# Altium PCB BSPD_V1.1.PcbDoc
Units mm, origin at the board's own origin, x right, y up, seen from the top; angles counter-clockwise.
Board outline 90 x 53 mm, 4 copper layers (Top Copper, Signal Layer 1, Signal Layer 2, Bottom Copper), stack 1.57 mm thick; 84 components, 54 nets, 263 pads, 174 vias.
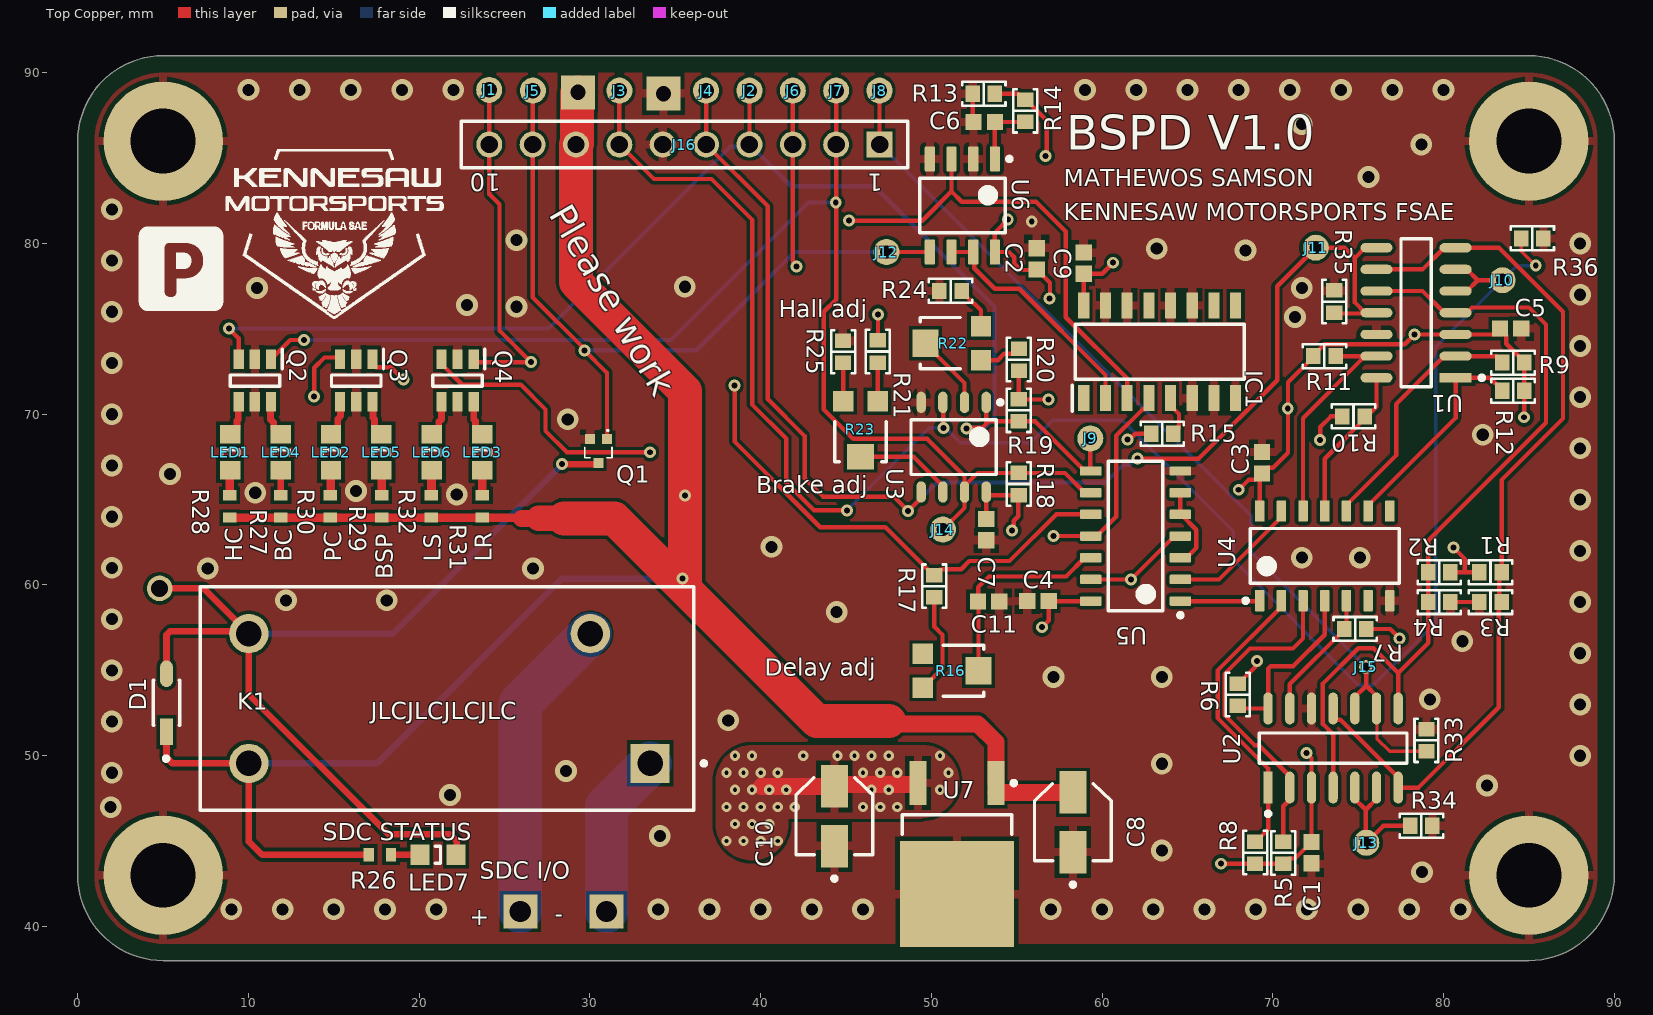
[diagram p0: Top Copper view]
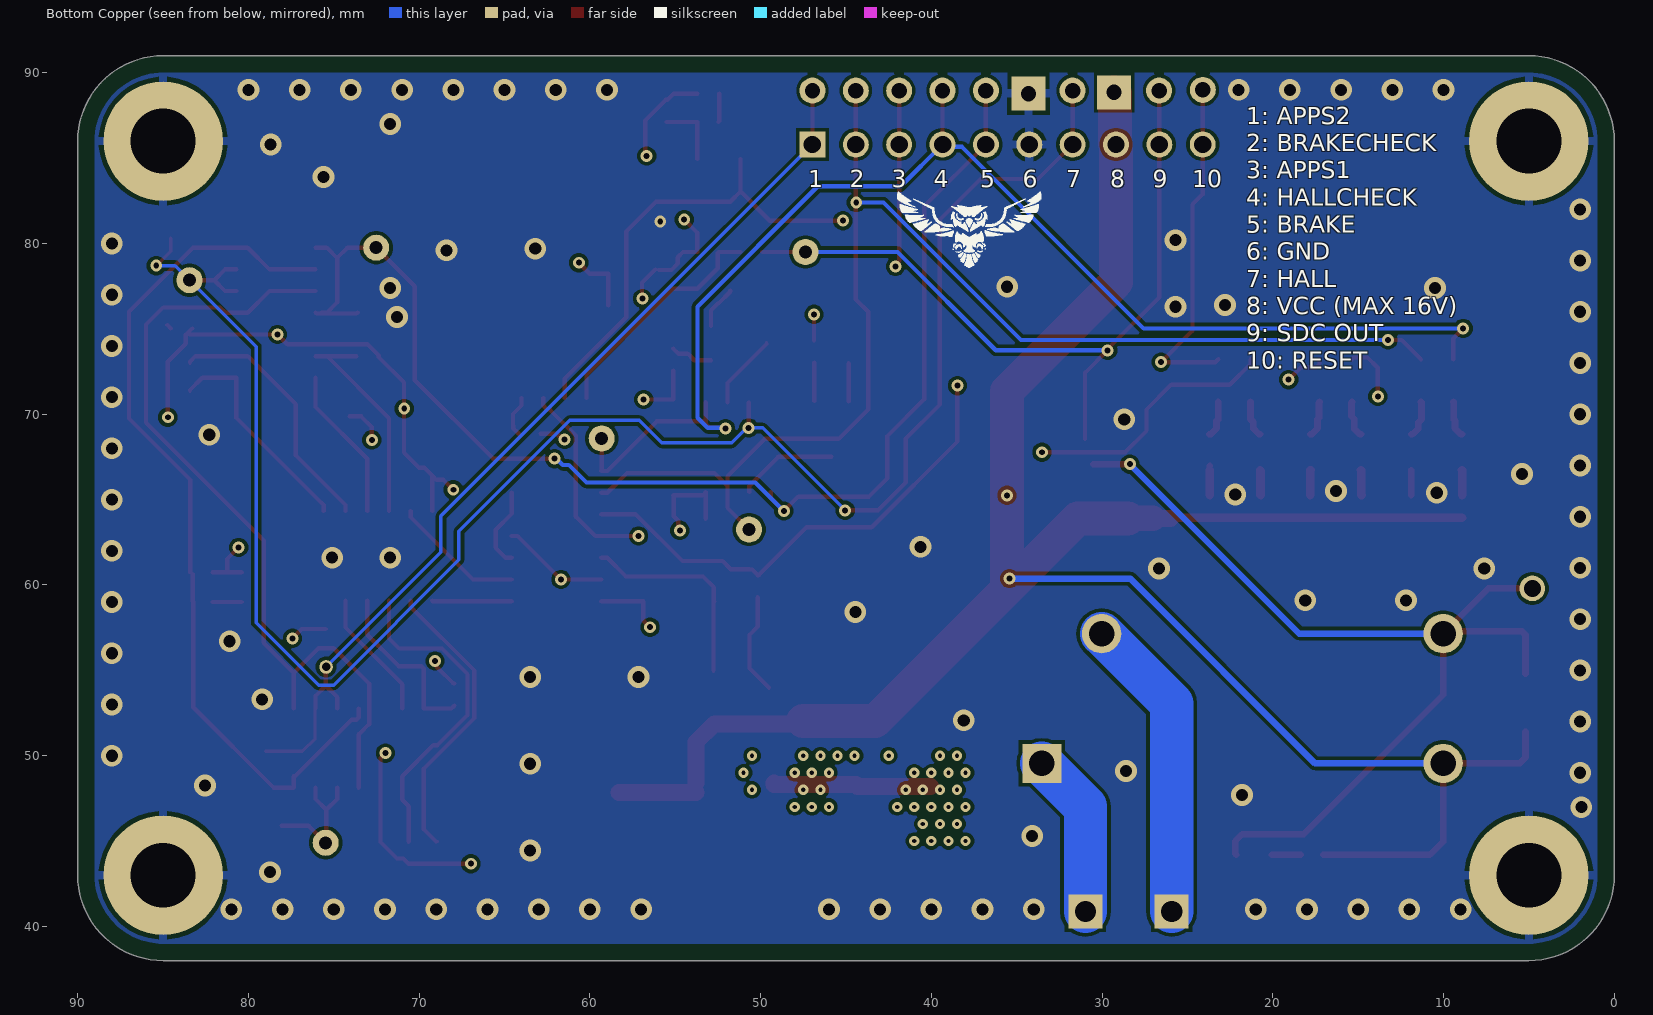
[diagram p1: Bottom Copper view, seen from below]
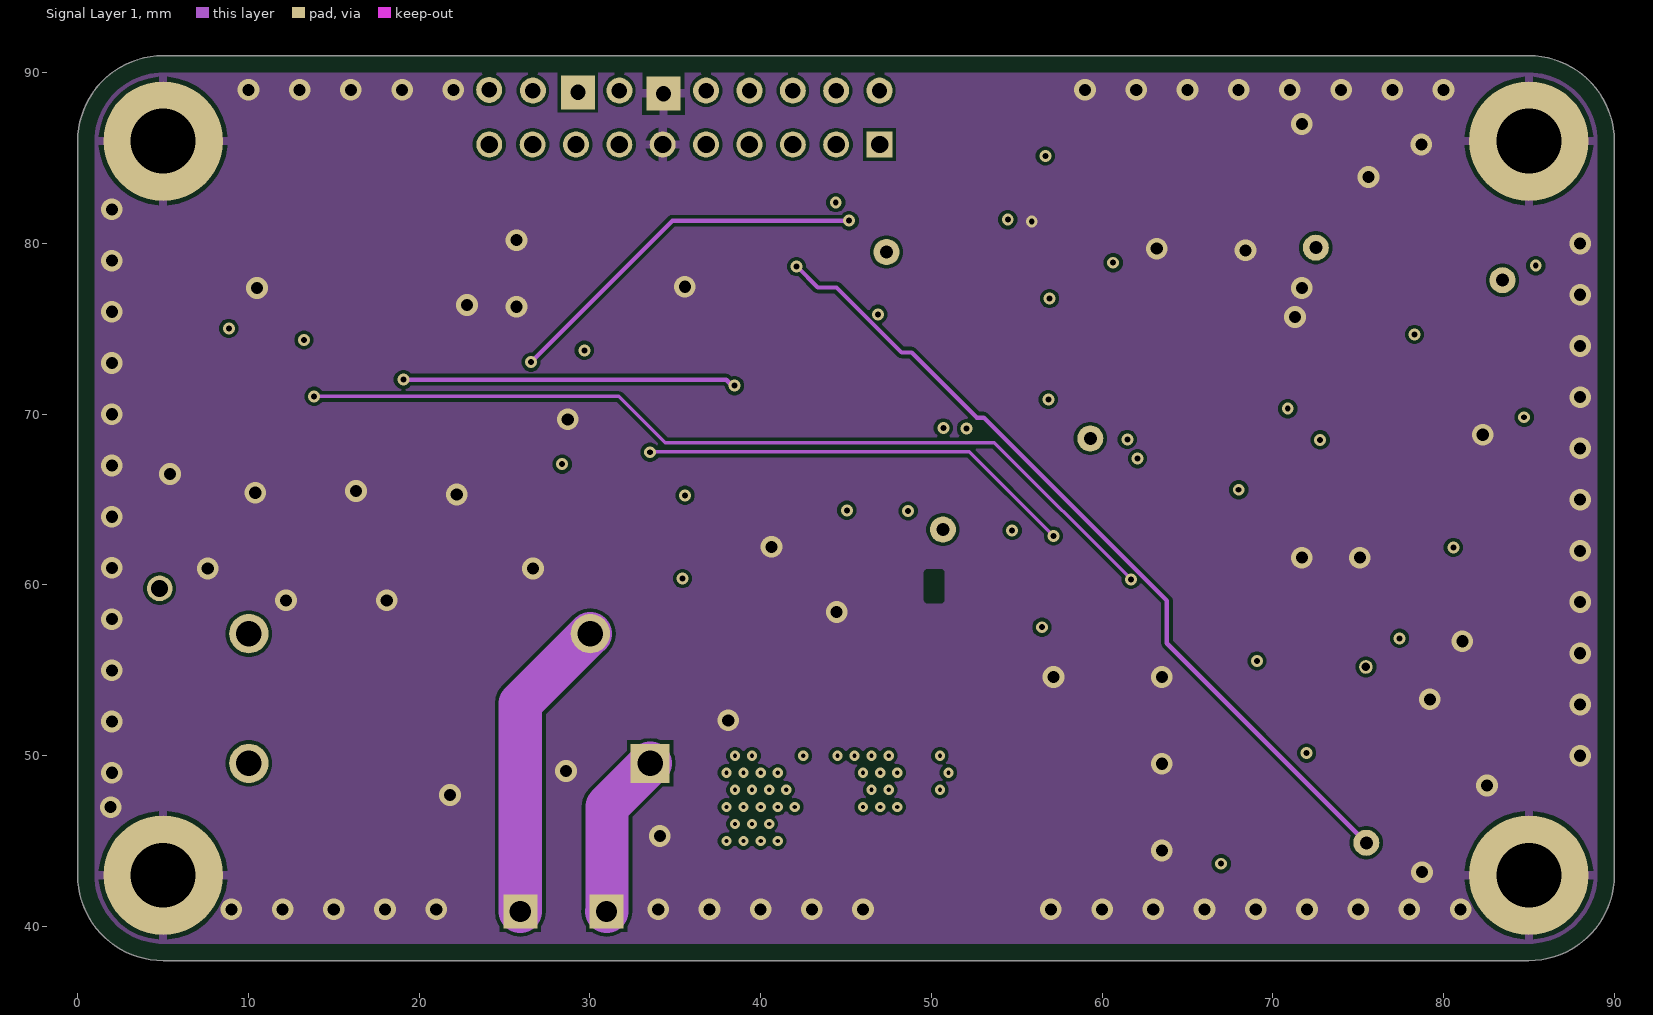
[diagram p2: Signal Layer 1]
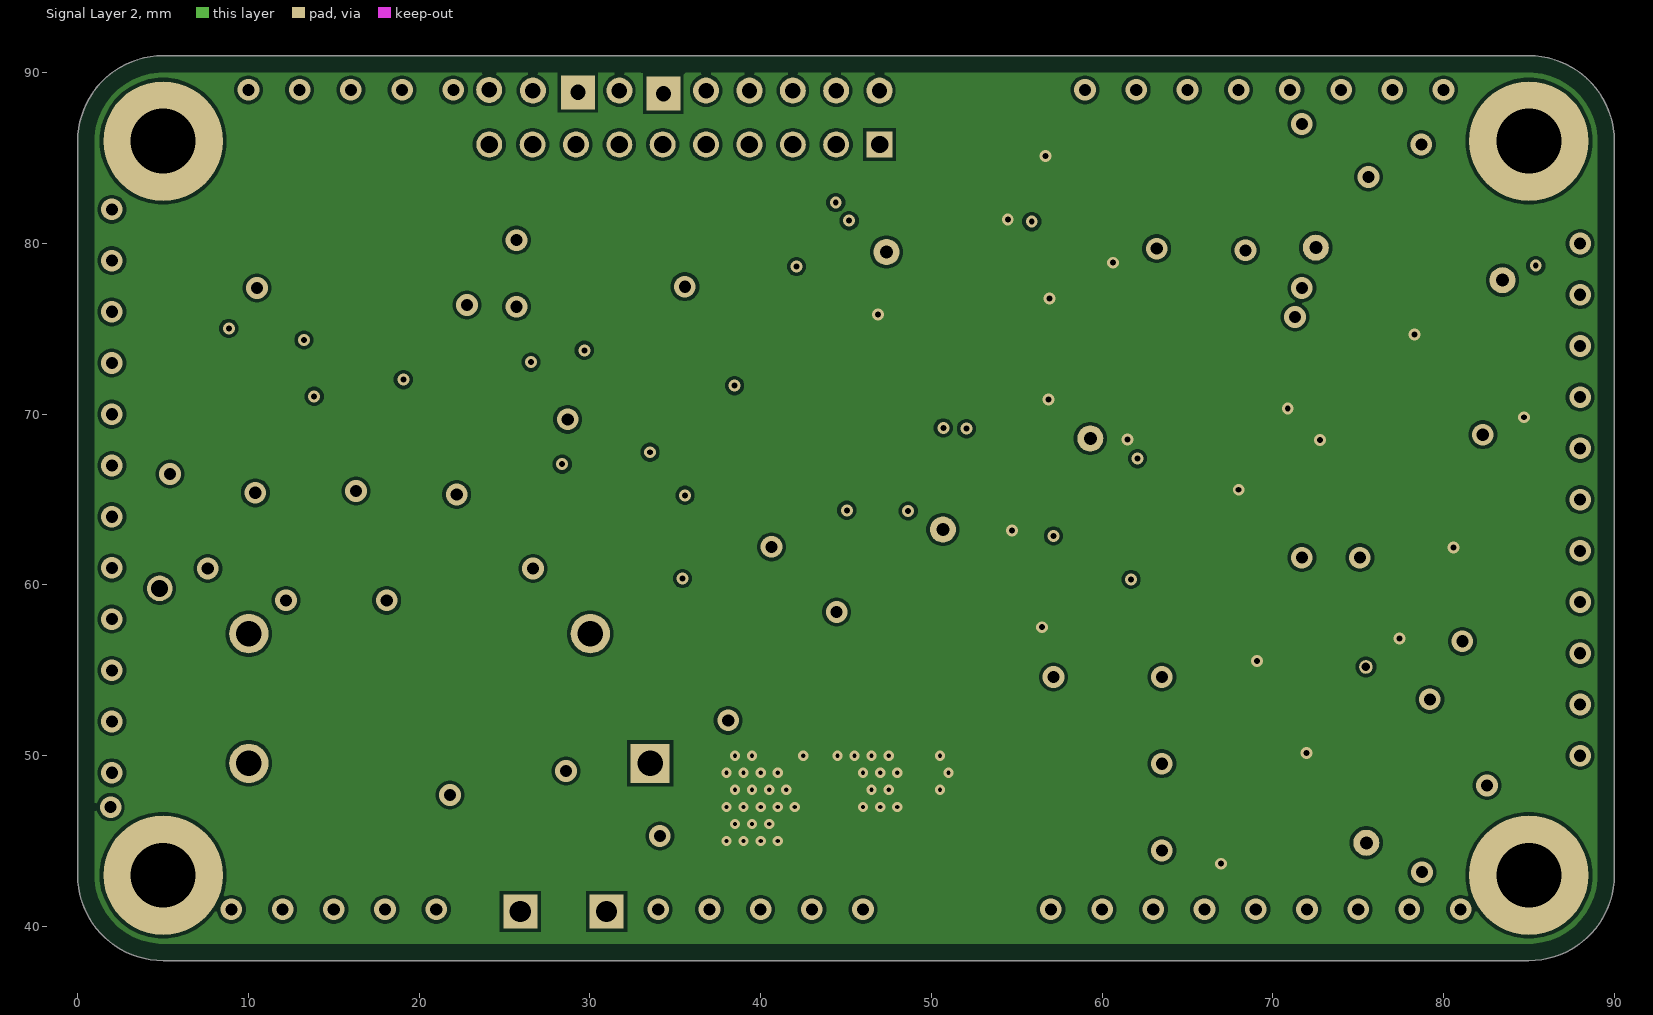
[diagram p3: Signal Layer 2]
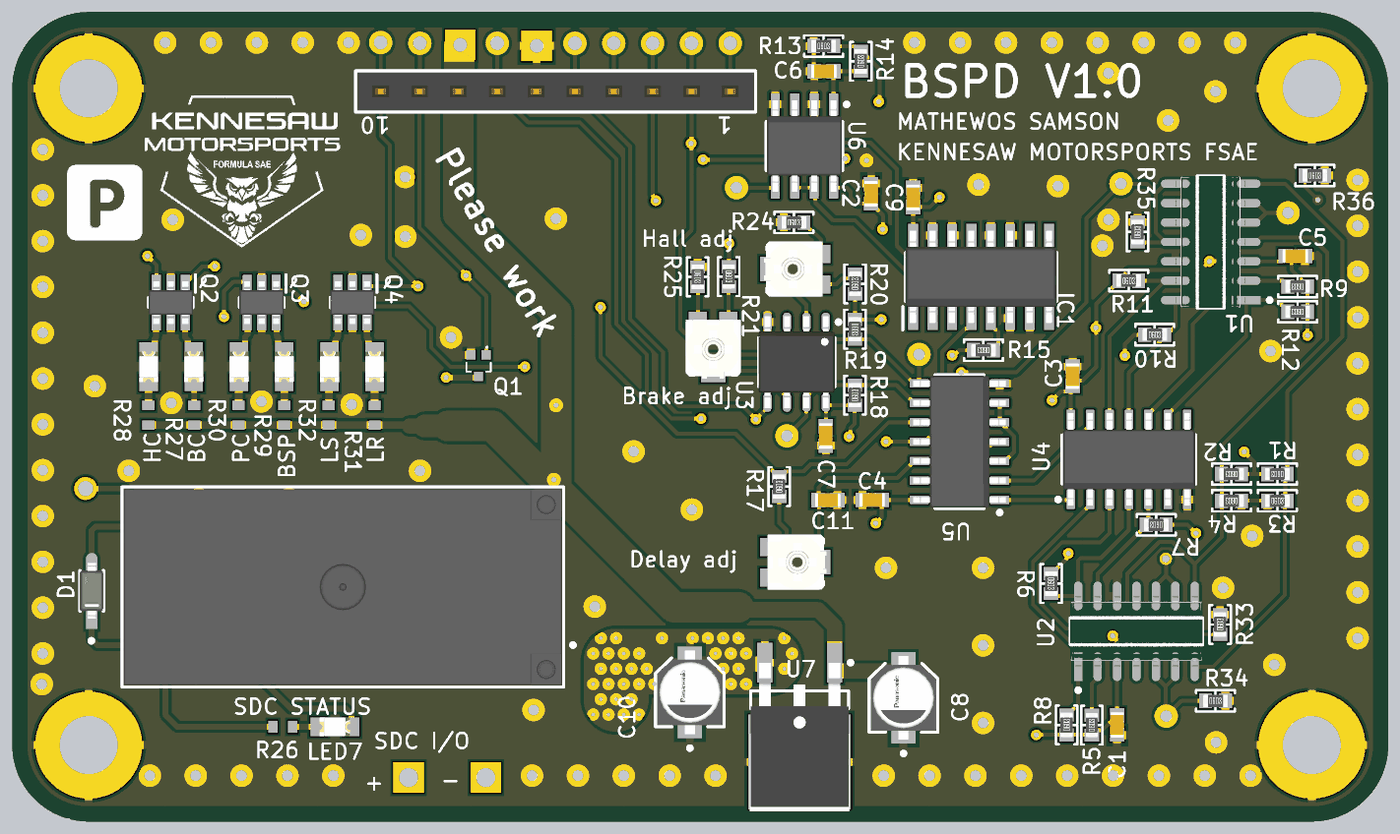
[diagram p4: 3D render of the assembled board from above, using the file's embedded part models]

## Layer stack, top to bottom
Top Mask: solder mask 0.015, Solder Resist, Dk 3.8
Top Copper: signal copper 0.035
Dielectric 1: prepreg 0.1, 2313, Dk 4.05
Signal Layer 1: signal copper 0.0175
Core: core 1.265, FR-4, Dk 4.5
Signal Layer 2: signal copper 0.0175
Dielectric 2: prepreg 0.1, 2313, Dk 4.05
Bottom Copper: signal copper 0.035
Bottom Mask: solder mask 0.015, Solder Resist, Dk 3.8

## Board outline
5,38 cw(c5,43) 0,43 0,86.005 cw(c5,86) 5,91 85,91 cw(c85,86) 90,86 90,43 cw(c85,43) 85,38

## Design rules (kind name [scope] priority, off if disabled: settings)
BoardOutlineClearance [All] p1: gap=0.2 ignorepadtopadclearanceinfootprint=FALSE except(0.4: Arc-SplitBarrior Arc-SplitContinuation Track-SplitBarrior Track-SplitContinuation SMDPad-SplitBarrior SMDPad-SplitContinuation THPad-SplitBarrior THPad-SplitContinuation Via-SplitBarrior Via-SplitContinuation Fill-SplitBarrior Fill-SplitContinuation Poly-SplitBarrior Poly-SplitContinuation Region-SplitBarrior Region-SplitContinuation Text-SplitBarrior Text-SplitContinuation)
Clearance "Clearance Bottom Layer" [OnLayer('Bottom Layer')] p1: gap=0.203 ignorepadtopadclearanceinfootprint=TRUE except(0.254: Arc-Text Track-Text SMDPad-Text THPad-Text Via-Text Fill-Text Poly-Text Region-Text Text-Text)
Clearance "Clearance Top Layer" [OnLayer('Top Layer')] p2: gap=0.203 ignorepadtopadclearanceinfootprint=TRUE except(0.254: Arc-Text Track-Text SMDPad-Text THPad-Text Via-Text Fill-Text Poly-Text Region-Text Text-Text)
Clearance [All] p3: gap=0.2 ignorepadtopadclearanceinfootprint=FALSE except(0.089: Arc-Arc Arc-Track Arc-SMDPad Track-Track Track-SMDPad SMDPad-SMDPad; 0.127: Arc-Via Track-Via SMDPad-Via THPad-Via Via-Via; 0.254: Arc-Text Track-Text SMDPad-Text THPad-Text Via-Text Fill-Text Poly-Text Region-Text Text-Text)
HoleSize [All] p1: absolutevalues=TRUE maxlimit=6.3 minlimit=0.2 maxpercent=80.000 minpercent=20.000
MinimumAnnularRing [All] p1: minimumring=0.076
MinimumSolderMaskSliver [All] p1: minsoldermaskwidth=0.1
PolygonConnect PolygonConnect_1 [All] p1: thpad.connectstyle=Relief thpad.reliefconductorwidth=0.508 thpad.reliefentries=4 thpad.polygonreliefangle="90 Angle" thpad.airgapwidth=0.254 smdpad.connectstyle=Relief smdpad.reliefconductorwidth=0.508 smdpad.reliefentries=4 smdpad.polygonreliefangle="90 Angle" smdpad.airgapwidth=0.254 via.connectstyle=Direct via.reliefconductorwidth=0.508 via.reliefentries=4 via.polygonreliefangle="90 Angle" via.airgapwidth=0.254
RoutingCorners [All] p1: cornerstyle=Round minsetback=2.54 maxsetback=2.54
RoutingVias [All] p1: holewidth=0.5 width=1 viastyle="Through Hole" minholewidth=0.2 minwidth=0.45 maxholewidth=1 maxwidth=2
SilkToSilkClearance [All] p1: silktosilkclearance=0.1
SilkToSolderMaskClearance [IsPad] p1: minsilkscreentomaskgap=0.1 clearancetoexposedcopper=TRUE
SolderMaskExpansion [All] p1: expansion=0.102 istentingtop=FALSE
Width [All] p1: maxlimit=2.54 minlimit=0.089 preferedwidth=0.381 toplayer_minwidth=0.089 minimp=50.000000 maximp=50.000000 favimp=50.000000
25 further rules are at their usual default settings.

## Classes and differential pairs
component class Sheet3: D1 J1 J2 J3 J4 J5 J6 J7 J8 J9 J10 J11 J12 J13 J14 J15 K1 LED1 LED2 LED3 LED4 LED5 LED6 LED7 Q1 Q2 Q3 Q4 R26 R27 R28 R29 R30 R31 R32
component class U_Sheet2: J16 R33 R34 R35 R36
component class U_BSPD_V1.1: C1 C2 C3 C4 C5 C6 C7 C8 C9 C10 C11 IC1 R1 R2 R3 R4 R5 R6 R7 R8 R9 R10 R11 R12 R13 R14 R15 R16 R17 R18 R19 R20 R21 R22 R23 R24 R25 U1 U2 U3 U4 U5 U6 U7

## Components (designator, comment, footprint, x,y, rotation, side; value= is the part's Value field where it differs from the comment)
C1 "Capacitor 100 nF +/-10% 50 V 0603" CAPC1608X90X40NL10T20 72.264,44.323 r270 top value=100nF
C2 "Capacitor 100 nF +/-10% 50 V 0603" CAPC1608X90X40NL10T20 56.175,79.1 r90 top value=100nF
C3 "Capacitor 100 nF +/-10% 50 V 0603" CAPC1608X90X40NL10T20 69.358,67.157 r90 top value=100nF
C4 "Capacitor 100 nF +/-10% 50 V 0603" CAPC1608X90X40NL10T20 56.246,59.055 r180 top value=100nF
C5 "Capacitor 100 nF +/-10% 50 V 0603" CAPC1608X90X40NL10T20 83.925,75.025 r0 top value=100nF
C6 "Capacitor 100 nF +/-10% 50 V 0603" CAPC1608X90X40NL10T20 53.096,87.122 r0 top value=10uF
C7 "Capacitor 100 nF +/-10% 50 V 0603" CAPC1608X90X40NL10T20 53.213,63.246 r270 top value=100nF
C8 "EEEFK1E100R" FP-FKB-MFG 58.293,46.101 r90 top
C9 "Capacitor 100 nF +/-10% 50 V 0603" CAPC1608X90X40NL10T20 58.928,78.857 r90 top value=100nF
C10 "EEEFK1E100R" FP-FKB-MFG 44.323,46.454 r90 top
C11 "Capacitor 100 nF +/-10% 50 V 0603" CAPC1608X90X40NL10T20 53.35,59.04 r0 top value=10uF
D1 "1N5819HW-7-F" FP-SOD123-IPC_A 5.2,53.1 r90 top
IC1 "CD4043BD" SOIC127P600X175-16N 63.373,73.66 r90 top
J1 "22AWG JUMPER" "22 AWG Hole"#1 24.1,89 r0 top
J2 "22AWG JUMPER" "22 AWG Hole"#2 39.232,88.955 r270 top
J3 "22AWG JUMPER" "22 AWG Hole"#3 30.825,88.955 r270 top
J4 "22AWG JUMPER" "22 AWG Hole"#4 36.311,88.955 r270 top
J5 "22AWG JUMPER" "22 AWG Hole"#1 26.659,88.955 r270 top
J6 "22AWG JUMPER" "22 AWG Hole"#5 41.899,88.955 r270 top
J7 "22AWG JUMPER" "22 AWG Hole"#6 44.35,88.955 r0 top
J8 "22AWG JUMPER" "22 AWG Hole"#7 46.85,88.955 r0 top
J9 "22AWG JUMPER" "22 AWG Hole"#8 59.309,68.58 r90 top
J10 "22AWG JUMPER" "22 AWG Hole"#8 83.45,77.85 r180 top
J11 "22AWG JUMPER" "22 AWG Hole"#8 72.517,79.756 r90 top
J12 "22AWG JUMPER" "22 AWG Hole"#8 47.371,79.502 r180 top
J13 "22AWG JUMPER" "22 AWG Hole"#8 75.475,44.9 r180 top
J14 "22AWG JUMPER" "22 AWG Hole"#8 50.673,63.246 r180 top
J15 "22AWG JUMPER" "22 AWG Hole"#9 75.45,55.2 r180 top
J16 "61301011821" 61301011821 35.535,85.8 r180 top locked
K1 "JW1AFSN-DC12V-TV-F" FP-JW1AFSN-DC12V-TV-F-MFG 21.625,53.35 r180 top
LED1 "150080SS75000" 0805_A 8.925,67.775 r270 top
LED2 "150080SS75000" 0805_A 14.835,67.775 r270 top
LED3 "150080SS75000" 0805_A 23.7,67.775 r270 top
LED4 "150080SS75000" 0805_A 11.88,67.775 r270 top
LED5 "150080SS75000" 0805_A 17.79,67.775 r270 top
LED6 "150080SS75000" 0805_A 20.745,67.775 r270 top
LED7 "150080SS75000" 0805_A 21.1,44.2 r180 top
Q1 "SSM3K36FS,LF" 1SS423 30.5,67.85 r180 top
Q2 "QS6K1FRATR" SOT95P280X100-6N 10.375,71.975 r270 top locked
Q3 "QS6K1FRATR" SOT95P280X100-6N 16.312,71.975 r270 top locked
Q4 "QS6K1FRATR" SOT95P280X100-6N 22.25,71.975 r270 top locked
R1 "10 kOhms" "RES 0603_1608" 82.75,60.75 r180 top
R2 "1.1 KOhms" "RES 0603_1608" 79.75,60.75 r180 top
R3 "1.1 KOhms" "RES 0603_1608" 82.75,59 r0 top
R4 "10 kOhms" "RES 0603_1608" 79.75,59 r180 top
R5 "5K" "RES 0603_1608" 70.613,44.308 r90 top
R6 "5K" "RES 0603_1608" 67.946,53.579 r270 top
R7 "5K" "RES 0603_1608" 74.825,57.425 r180 top
R8 "5K" "RES 0603_1608" 68.962,44.323 r90 top
R9 "5K" "RES 0603_1608" 84.074,73.025 r180 top
R10 "5K" "RES 0603_1608" 74.725,69.875 r0 top
R11 "5K" "RES 0603_1608" 73.025,73.406 r0 top
R12 "5K" "RES 0603_1608" 84.074,71.374 r180 top
R13 "500k" "RES 0603_1608" 53.071,88.773 r0 top
R14 "100K" "RES 0603_1608" 55.499,87.772 r90 top
R15 "5K" "RES 0603_1608" 63.524,68.858 r180 top
R16 "10 kOhms" "POT BOURNS TRIMPOT TC33" 51.308,54.976 r270 top
R17 "50K" "RES 0603_1608" 50.165,59.929 r90 top
R18 "5K" "RES 0603_1608" 55.118,65.913 r90 top
R19 "5K" "RES 0603_1608" 55.118,70.231 r270 top
R20 "5K" "RES 0603_1608" 55.125,73.2 r90 top
R21 "5K" "RES 0603_1608" 46.863,73.675 r270 top
R22 "10 kOhms" "POT BOURNS TRIMPOT TC33" 51.107,74.168 r90 top
R23 "10 kOhms" "POT BOURNS TRIMPOT TC33" 45.847,68.961 r180 top
R24 "5K" "RES 0603_1608" 51.125,77.225 r0 top
R25 "5K" "RES 0603_1608" 44.831,73.66 r270 top
R26 "RC0603FR-072K2L" RESC1608X55X25LL10T15 17.7,44.2 r0 top
R27 "RC0603FR-072K2L" RESC1608X55X25LL10T15 11.9,64.6 r270 top
R28 "RC0603FR-072K2L" RESC1608X55X25LL10T15 8.9,64.6 r270 top
R29 "RC0603FR-072K2L" RESC1608X55X25LL10T15 17.8,64.6 r270 top
R30 "RC0603FR-072K2L" RESC1608X55X25LL10T15 14.8,64.6 r270 top
R31 "RC0603FR-072K2L" RESC1608X55X25LL10T15 23.7,64.6 r270 top
R32 "RC0603FR-072K2L" RESC1608X55X25LL10T15 20.7,64.6 r270 top
R33 "50K" "RES 0603_1608" 79,50.9 r90 top
R34 "50K" "RES 0603_1608" 78.7,45.9 r0 top
R35 "50K" "RES 0603_1608" 73.6,76.6 r90 top
R36 "50K" "RES 0603_1608" 85.2,80.3 r0 top
U1 "LM139DR" FP-D0014A-IPC_C 78.389,75.946 r180 top
U2 "LM139DR" FP-D0014A-IPC_C 73.534,50.449 r90 top
U3 "LM393DT" STM-SO-8_D_L 51.308,68.072 r270 top
U4 "CD4002BM96" D0014A_L 73.041,61.706 r90 top
U5 "CD4011BM96" D0014A_L 61.961,62.865 r180 top
U6 "CD40107BM96" D0008A_N 51.816,82.228 r270 top
U7 "LF50ABDT-TRY" DPAK228P972X238-3N 51.5,44.25 r270 top

## Footprints (in the part's own frame and the unit in brackets; to place one, negate y for a bottom-side part, rotate by r counter-clockwise, add the part's x,y. Pads: shape width x height; smd on the part's side, far side on the other; paste and mask are expansions set on the pad)
1SS423 [mm]
  rect 0.6x0.6 smd: 1(-0.5,-0.7) 2(0.5,-0.7) 3(0,0.7)
  silkscreen extent -0.8,-1.25 0.8,0.4
"22 AWG Hole"#1 [mil] "Solder 22awg or whatever wire fits into this"
  round 60 hole 35.43 mask+0: 1(0,0)
"22 AWG Hole"#2 [mil] "Solder 22awg or whatever wire fits into this"
  round 60 hole 35.43 mask+0: 1(0,4.45)
"22 AWG Hole"#3 [mil] "Solder 22awg or whatever wire fits into this"
  round 60 hole 35.43 mask+0: 1(0,35.43)
"22 AWG Hole"#4 [mil] "Solder 22awg or whatever wire fits into this"
  round 60 hole 35.43 mask+0: 1(0,19.45)
"22 AWG Hole"#5 [mil] "Solder 22awg or whatever wire fits into this"
  round 60 hole 35.43 mask+0: 1(0,-0.55)
"22 AWG Hole"#6 [mil] "Solder 22awg or whatever wire fits into this"
  round 60 hole 35.43 mask+0: 1(2.95,0)
"22 AWG Hole"#7 [mil] "Solder 22awg or whatever wire fits into this"
  round 60 hole 35.43 mask+0: 1(4.53,0)
"22 AWG Hole"#8 [mil] "Solder 22awg or whatever wire fits into this"
  round 60 hole 30 mask+0: 1(0,0)
"22 AWG Hole"#9 [mil] "Solder 22awg or whatever wire fits into this"
  round 31.5 hole 19.68 mask+0: 1(0,0)
0805_A [mm] "Chip LED, 2-Leads, Body 2.0x1.3mm, IPC Medium Density"
  rect 1.1x1.2 smd: 1(-1.05,0) 2(1.05,0)
  silkscreen extent -0.15,-0.5 0.15,0.5, body extent -1,-0.62 1,0.63, height 0.68
61301011821 [mm] "Socket Header, Pitch 2.54 mm, THT, Vertical, single row, 10p"
  rect 1.52x1.52 hole 1.02: 1(-11.43,0)
  round 1.52 hole 1.02: 2(-8.89,0) 3(-6.35,0) 4(-3.81,0) 5(-1.27,0) 6(1.27,0) 7(3.81,0) 8(6.35,0) 9(8.89,0) 10(11.43,0)
  silkscreen extent -13.08,-1.35 13.08,1.35, body extent -12.95,-1.25 12.95,1.25, height 8.55
CAPC1608X90X40NL10T20 [mm] "Chip Capacitor, 2-Leads, Body 1.70x0.90mm, IPC Medium Density"
  rect 0.95x0.95 smd: 1(-0.625,0) 2(0.625,0)
  body extent -0.85,-0.45 0.85,0.45, height 0.9
D0008A_N [mm] "SOIC, 8-Leads, Body 5x4mm, Pitch 1.27mm, IPC Medium Density"
  rrect17% 1.45x0.6 smd: 1(-2.725,1.905) 2(-2.725,0.635) 3(-2.725,-0.635) 4(-2.725,-1.905) 5(2.725,-1.905) 6(2.725,-0.635) 7(2.725,0.635) 8(2.725,1.905)
  silkscreen extent -2.85,-2.5 1.6,2.88, body extent -3,-2.45 3,2.45, height 1.63
D0014A_L [mm] "SOIC, 14-Leads, Body 8.75x4mm, Pitch 1.27mm, IPC High Density"
  rrect18% 1.25x0.55 smd: 1(-2.625,3.81) 2(-2.625,2.54) 3(-2.625,1.27) 4(-2.625,0) 5(-2.625,-1.27) 6(-2.625,-2.54) 7(-2.625,-3.81) 8(2.625,-3.81) 9(2.625,-2.54) 10(2.625,-1.27) 11(2.625,0) 12(2.625,1.27) 13(2.625,2.54) 14(2.625,3.81)
  silkscreen extent -2.75,-4.38 1.6,4.76, body extent -3.02,-4.32 3.02,4.32, height 1.59
DPAK228P972X238-3N [mm] "D-PAK, 3-Pads, Body 6.40x6.56mm (max), IPC Medium Density"
  rect 2.6x1 smd: 1(-4.15,2.28) 3(-4.15,-2.28)
  rect 6.2x6.7 smd: 4(2.35,0)
  silkscreen extent -4.27,-3.2 -1.15,3.46, body extent -4.12,-3.25 5.6,3.25, height 3.28
FP-D0014A-IPC_C [mm]
  rect 1.874x0.542 smd paste+0 mask+0: 1(-2.316,3.81)
  rrect100% 1.874x0.542 smd paste+0 mask+0: 2(-2.316,2.54) 3(-2.316,1.27) 4(-2.316,0) 5(-2.316,-1.27) 6(-2.316,-2.54) 7(-2.316,-3.81) 8(2.316,-3.81) 9(2.316,-2.54) 10(2.316,-1.27) 11(2.316,0) 12(2.316,1.27) 13(2.316,2.54) 14(2.316,3.81)
  silkscreen extent -3.98,-4.33 0.88,4.33, body extent -3.35,-4.43 3.35,4.43, height 0.25
FP-FKB-MFG [mm]
  rect 2.5x1.6 smd paste+0 mask+0: 1(-1.75,0) 2(1.75,0)
  silkscreen extent -3.77,-2.25 2.25,2.25, body extent -3.25,-2.5 3.25,2.5, height 0.25
FP-JW1AFSN-DC12V-TV-F-MFG [mm]
  rect 2.3x2.3 hole 1.5 paste-1000 mask+0: 1(-11.9,3.8)
  round 2.3 hole 1.5 paste-1000 mask+0: 2(11.6,3.8) 3(-8.4,-3.8) 4(11.6,-3.8)
  silkscreen extent -15.18,-6.55 14.45,6.55, body extent -14.55,-6.65 14.55,6.65, height 0.25
FP-SOD123-IPC_A [mm]
  rect 1.557x0.742 smd paste+0 mask+0: 1(-1.7,0)
  rrect100% 1.557x0.742 smd paste+0 mask+0: 2(1.7,0)
  silkscreen extent -3.39,-0.77 1.33,0.77, body extent -2.98,-1.28 2.98,1.28, height 0.25
"POT BOURNS TRIMPOT TC33" [mm] "Bourns Trimpot TC33X-1 - Open Frame 3mm x 3.8mm x 1.2mm"
  rect 1.2x1.2 smd: 1(-1,-1.8) 3(1,-1.8)
  rect 1.6x1.5 smd: 2(0,1.45)
  silkscreen extent -1.5,-0.6 1.5,1.75, body extent -1.8,-1.91 1.8,1.95, height 1.15
"RES 0603_1608" [mm] "Chip Resistor, 2-Leads, Body 1.60x0.80mm, IPC Medium Density"
  rect 0.85x0.95 smd: 1(-0.65,0) 2(0.65,0)
  silkscreen extent -1.27,-0.7 1.27,0.7, body extent -0.8,-0.4 0.8,0.4, height 0.45
RESC1608X55X25LL10T15 [mm] "Chip Resistor, 2-Leads, Body 1.60x0.80mm, IPC High Density"
  rect 0.6x0.8 smd: 1(-0.65,0) 2(0.65,0)
  body extent -0.85,-0.45 0.85,0.45, height 0.55
SOIC127P600X175-16N [mm]
  rect 1.525x0.65 smd: 1(-2.712,4.445) 2(-2.712,3.175) 3(-2.712,1.905) 4(-2.712,0.635) 5(-2.712,-0.635) 6(-2.712,-1.905) 7(-2.712,-3.175) 8(-2.712,-4.445) 9(2.712,-4.445) 10(2.712,-3.175) 11(2.712,-1.905) 12(2.712,-0.635) 13(2.712,0.635) 14(2.712,1.905) 15(2.712,3.175) 16(2.712,4.445)
  silkscreen extent -3.47,-4.95 1.6,5.12, body extent -3.01,-4.94 3.01,4.96, height 1.75
SOT95P280X100-6N [mm]
  rect 1.15x0.6 smd: 1(-1.25,0.95) 2(-1.25,0) 3(-1.25,-0.95) 4(1.25,-0.95) 5(1.25,0) 6(1.25,0.95)
  silkscreen extent -1.83,-1.45 0.33,1.6, body extent -1.4,-1.45 1.4,1.45, height 1
STM-SO-8_D_L [mm] "SOIC, 8-Leads, Body 5x4mm, Pitch 1.27mm, IPC High Density"
  oval 1.25x0.55 smd: 1(-2.625,1.905) 2(-2.625,0.635) 3(-2.625,-0.635) 4(-2.625,-1.905) 5(2.625,-1.905) 6(2.625,-0.635) 7(2.625,0.635) 8(2.625,1.905)
  silkscreen extent -2.75,-2.5 1.6,2.86, body extent -3,-2.5 3,2.5, height 1.75

## Part data
C1 C2 C3 C4 C5 C6 C7 C9 C11: library part CMP-001-00017-6, "Chip Capacitor, 100 nF, +/- 10%, 50 V, 0603 (1608 Metric)", Capacitor Type=Ceramic, Case/Package=0603, Max Operating Temperature=125°C, Min Operating Temperature=-55°C, Tolerance=10%, Voltage Rating=50V, Mounting Technology=SM, Pins=2, RoHS Compliant=True
C8 C10: library part CMP-05427-000055-1, "CAP ALUM 10UF 20% 25V SMD", Capacitance=10uF, Case/Package=Radial, Dielectric Material=Aluminium, ESR (Equivalent Series Resistance)=1.35R, Leakage Current=3uA, Max Operating Temperature=105°C, Min Operating Temperature=-55°C, Package Quantity=1, Ripple Current=90mA, Tolerance=20%, Voltage=25V, Construction=Cylindrical, Contact Plating=Tin, Diameter=4mm, Height=5.8mm, Height - Seated (Max)=0.24inch, Impedance=1.35R, Lead Free="Lead Free", Length=5.8mm, Life (Hours)=2000Hour, Mount="Surface Mount", Number of Pins=2, Packaging="Tape and Reel", Polarity=Polar, Radiation Hardening=No, REACH SVHC="No SVHC", Ripple Current (AC)=90mA, RoHS Compliant=Yes, Series=FK, Termination=SMD/SMT, Voltage Rating=25V, Voltage Rating (DC)=25V, Width=5.5mm
D1: library part CMP-0303-00003-3, "DIODE SCHOTTKY 40V 1A SOD123", Average Rectified Current=1A, Capacitance=110pF, Case/Package=SOD-123-2, Forward Voltage=450mV, Max Forward Surge Current (Ifsm)=25A, Max Operating Temperature=125°C, Max Power Dissipation=450mW, Max Repetitive Reverse Voltage (Vrrm)=40V, Min Operating Temperature=-65°C, Package Quantity=3000, Peak Reverse Current=50uA, Contact Plating=Tin, Current Rating=1A, Element Configuration=Single, Forward Current=1A, Height=1.25mm, Lead Free="Lead Free", Length=2.85mm, Max Reverse Voltage (DC)=40V, Number of Pins=2, Output Current=1A, Packaging="Tape and Reel", Peak Non-Repetitive Surge Current=25A, Polarity=Standard, Radiation Hardening=No, REACH SVHC="No SVHC", Termination=SMD/SMT, Voltage Rating (DC)=40V, Weight=0.000353oz, Width=1.7mm
IC1: "Integrated Circuit", Manufacturer_Name="Texas Instruments", Mouser Part Number=595-CD4043BD, Arrow Part Number=CD4043BD, Arrow Price/Stock=https://www.arrow.com/en/products/cd4043bd/texas-instruments, Datasheet Link=http://www.ti.com/lit/gpn/CD4043B, Height=1.75mm, Manufacturer_Part_Number=CD4043BD, Mouser Price/Stock=https://www.mouser.co.uk/ProductDetail/Texas-Instruments/CD4043BD?qs=LSR%252BNeaw%2FwBT%2FmtVlwfGdg%3D%3D
J16: library part CMP-1502-01332-1, "THT Vertical Socket Header WR-PHD, Pitch 2.54 mm, Single Row, 10 pins", Contact Resistance=20mOhm, Manufacturer="Wurth Elektronik", Operating Temperature=-40to125degC, Rated Current=3A, Withstanding Voltage=500VAC, Working Voltage=250VAC, Datasheet URL=https://katalog.we-online.de/em/datasheet/6130xx11821.pdf, Gender=Female, Manufacturer URL=http://www.we-online.de, Mounting Technology=THT, Orientation=Vertical, Package Reference=61301011821, Packaging=Tray, Part Number=61301011821, Pin Number=10, Pitch=2.54mm, Publisher=WurthElektronik, Row Number=Single
K1: library part CMP-05606-000032-1, "RELAY GEN PURPOSE SPST 10A 12V", Coil Current=44mA, Coil Power=530mW, Coil Resistance=270R, Coil Voltage (DC)=12V, Contact Current Rating=10A, Max Operating Temperature=60°C, Max Voltage Rating (AC)=250V, Max Voltage Rating (DC)=30V, Min Operating Temperature=-40°C, Package Quantity=100, Coil Type=Non-Latching, Contact Material=Tin, Current Rating=10A, Depth=28.6mm, Height=20mm, Length=12.8mm, Life (Hours)=5Hour, Max Current Rating=10A, Mount="Through Hole", Number of Pins=4, Operate Time=15ms, Packaging=Bulk, Relay Type="General Purpose", Release Time=5ms, Series=JW, Termination="PC Pin", Throw Configuration=SPST, Weight=13g
LED1 LED2 LED3 LED4 LED5 LED6 LED7: library part CMP-1426-00010-1, "SMD mono-color Chip LED, WL-SMCW, Super Red", Color="Super Red", Manufacturer="Wuerth Elektronik", ComponentLink1Description="Manufacturer URL", ComponentLink1URL=http://www.we-online.com, ComponentLink2Description=Datasheet, ComponentLink2URL=http://katalog.we-online.com/led/datasheet/150080SS75000.pdf, PackageReference=0805_A, PartNumber=150080SS75000
Q1: "MOSFET (N-Channel)", Manufacturer_Name=Toshiba, Mouser Part Number=757-SSM3K36FSLF, Arrow Part Number=SSM3K36FS,LF, Arrow Price/Stock=https://www.arrow.com/en/products/ssm3k36fslf/toshiba, Datasheet Link=http://toshiba.semicon-storage.com/info/docget.jsp?did=11220&prodName=SSM3K36FS, Height=0mm, Manufacturer_Part_Number=SSM3K36FS,LF, Mouser Price/Stock=https://www.mouser.co.uk/ProductDetail/Toshiba/SSM3K36FSLF?qs=rsevcuukUAyNuioVUhNFrQ%3D%3D
Q2 Q3 Q4: "MOSFET (N-Channel)", Manufacturer_Name="ROHM Semiconductor", Mouser Part Number=755-QS6K1FRATR, Datasheet Link=https://www.rohm.com/products/mosfets/automotive/dual/qs6k1fra-product, Height=1mm, Manufacturer_Part_Number=QS6K1FRATR, Mouser Price/Stock=https://www.mouser.co.uk/ProductDetail/ROHM-Semiconductor/QS6K1FRATR?qs=4v%252BiZTmLVHGPs3XXnzhw7A%3D%3D
R1 R4: library part CPF0603B10KE, "RES SMD 10K OHM 0.1% 1/16W 0603", Device Package="0603 (1608 Metric)", Manufacturer="TE Connectivity Passive Product", Operating Temperature="-55°C ~ 155°C", Power (Watts)="0.063W, 1/16W", Supplier Device Package=0603, Supplier Part Number 1=A119886CT-ND, Temperature Coefficient=±25ppm/°C, Tolerance=±0.1%, ComponentLink1Description=Datasheet, ComponentLink1URL=https://www.te.com/commerce/DocumentDelivery/DDEController?Action=srchrtrv&DocNm=1773200&DocType=DS&DocLang=English, ComponentLink2Description="DigiKey Link", ComponentLink2URL=http://digikey.com/product-detail/en/te-connectivity-passive-product/CPF0603B10KE/A119886CT-ND/4966484, Composition="Thin Film", Height - Seated (Max)="0.022\" (0.55mm)", LastUpdated="9/2/2020 1:10:25 AM", Lifecycle Status=Active, Minimum Order=1, Number of Terminations=2, Package / Case="0603 (1608 Metric)", Packaging=TapeAndReel, Part Number=CPF0603B10KE, Part Status=Active, PartId=4872, Price=0.09, Resistance="10 kOhms", Series="CPF, Neohm", Size / Dimension="0.061\" L x 0.031\" W (1.55mm x 0.80mm)", Supplier 1=DigiKey
R2 R3: library part RK73H1JTTD4420F, "RES 442 OHM 1% 1/8W 0603", Device Package="0603 (1608 Metric)", Manufacturer="KOA Speer Electronics, Inc.", Operating Temperature="-55°C ~ 155°C", Power (Watts)="0.125W, 1/8W", Ratings=AEC-Q200, Resistance="442 Ohms", Supplier Device Package=0603, Supplier Part Number 1=2019-RK73H1JTTD4420FCT-ND, Temperature Coefficient=±100ppm/°C, Tolerance=±1%, ComponentLink1Description=Datasheet, ComponentLink1URL=http://www.koaspeer.com/catimages/Products/RK73H/RK73H.pdf, ComponentLink2Description="DigiKey Link", ComponentLink2URL=http://digikey.com/product-detail/en/koa-speer-electronics-inc/RK73H1JTTD4420F/2019-RK73H1JTTD4420FCT-ND/9847257, Composition="Thick Film", Features="Automotive AEC-Q200, Moisture Resistant", Height - Seated (Max)="0.022\" (0.55mm)", LastUpdated="9/2/2020 1:09:26 AM", Lifecycle Status=Active, Minimum Order=1, Number of Terminations=2, Package / Case="0603 (1608 Metric)", Packaging=CutTape, Part Number=RK73H1JTTD4420F, Part Status=Active, PartId=26603, Price=0.10, Series=RK73H, Size / Dimension="0.063\" L x 0.031\" W (1.60mm x 0.80mm)", Supplier 1=DigiKey
R5 R6 R7 R8 R9 R10 R11 R12 R15 R18 R19 R20 R21 R24 R25: library part CRGP0603F5K6, "CRGP 0603 5K6 1%", Device Package="0603 (1608 Metric)", Manufacturer="TE Connectivity Passive Product", Operating Temperature="-55°C ~ 155°C", Power (Watts)="0.25W, 1/4W", Resistance="5.6 kOhms", Supplier Device Package=0603, Supplier Part Number 1=A130425CT-ND, Temperature Coefficient=±100ppm/°C, Tolerance=±1%, ComponentLink1Description=Datasheet, ComponentLink1URL=https://www.te.com/commerce/DocumentDelivery/DDEController?Action=srchrtrv&DocNm=9-1773463-9&DocType=DS&DocLang=English, ComponentLink2Description="DigiKey Link", ComponentLink2URL=http://digikey.com/product-detail/en/te-connectivity-passive-product/CRGP0603F5K6/A130425CT-ND/8578257, Composition="Thick Film", Features="Pulse Withstanding", Height - Seated (Max)="0.022\" (0.55mm)", LastUpdated="9/2/2020 1:09:50 AM", Lifecycle Status=Active, Minimum Order=1, Number of Terminations=2, Package / Case="0603 (1608 Metric)", Packaging=TapeAndReel, Part Number=CRGP0603F5K6, Part Status=Active, PartId=20907, Price=0.02, Series=CRGP, Size / Dimension="0.063\" L x 0.031\" W (1.60mm x 0.80mm)", Supplier 1=DigiKey
R13: library part CRGP0603F5K6, "CRGP 0603 5K6 1%", Device Package="0603 (1608 Metric)", Manufacturer="TE Connectivity Passive Product", Operating Temperature="-55°C ~ 155°C", Power (Watts)="0.25W, 1/4W", Supplier Device Package=0603, Supplier Part Number 1=A130425CT-ND, Temperature Coefficient=±100ppm/°C, Tolerance=±1%, ComponentLink1Description=Datasheet, ComponentLink1URL=https://www.te.com/commerce/DocumentDelivery/DDEController?Action=srchrtrv&DocNm=9-1773463-9&DocType=DS&DocLang=English, ComponentLink2Description="DigiKey Link", ComponentLink2URL=http://digikey.com/product-detail/en/te-connectivity-passive-product/CRGP0603F5K6/A130425CT-ND/8578257, Composition="Thick Film", Features="Pulse Withstanding", Height - Seated (Max)="0.022\" (0.55mm)", LastUpdated="9/2/2020 1:09:50 AM", Lifecycle Status=Active, Minimum Order=1, Number of Terminations=2, Package / Case="0603 (1608 Metric)", Packaging=TapeAndReel, Part Number=CRGP0603F5K6, Part Status=Active, PartId=20907, Price=0.02, Resistance=500k, Series=CRGP, Size / Dimension="0.063\" L x 0.031\" W (1.60mm x 0.80mm)", Supplier 1=DigiKey
R14: library part CRGP0603F5K6, "CRGP 0603 5K6 1%", Device Package="0603 (1608 Metric)", Manufacturer="TE Connectivity Passive Product", Operating Temperature="-55°C ~ 155°C", Power (Watts)="0.25W, 1/4W", Resistance=100KOHM, Supplier Device Package=0603, Supplier Part Number 1=A130425CT-ND, Temperature Coefficient=±100ppm/°C, Tolerance=±1%, ComponentLink1Description=Datasheet, ComponentLink1URL=https://www.te.com/commerce/DocumentDelivery/DDEController?Action=srchrtrv&DocNm=9-1773463-9&DocType=DS&DocLang=English, ComponentLink2Description="DigiKey Link", ComponentLink2URL=http://digikey.com/product-detail/en/te-connectivity-passive-product/CRGP0603F5K6/A130425CT-ND/8578257, Composition="Thick Film", Features="Pulse Withstanding", Height - Seated (Max)="0.022\" (0.55mm)", LastUpdated="9/2/2020 1:09:50 AM", Lifecycle Status=Active, Minimum Order=1, Number of Terminations=2, Package / Case="0603 (1608 Metric)", Packaging=TapeAndReel, Part Number=CRGP0603F5K6, Part Status=Active, PartId=20907, Price=0.02, Series=CRGP, Size / Dimension="0.063\" L x 0.031\" W (1.60mm x 0.80mm)", Supplier 1=DigiKey
R16 R22 R23: library part TC33X-2-103E, "TRIMMER 10K OHM 0.1W J LEAD TOP", Manufacturer="Bourns Inc.", Power (Watts)="0.1W, 1/10W", Resistive Material=Cermet, Supplier Part Number 1=TC33X-103ECT-ND, Temperature Coefficient=±250ppm/°C, Tolerance=±25%, Adjustment Type="Top Adjustment", ComponentLink1Description=Datasheet, ComponentLink1URL=https://www.bourns.com/docs/Product-Datasheets/TC33.pdf, ComponentLink2Description="DigiKey Link", ComponentLink2URL=http://digikey.com/product-detail/en/bourns-inc/TC33X-2-103E/TC33X-103ECT-ND/612911, LastUpdated="9/2/2020 1:21:42 AM", Lifecycle Status=Active, Minimum Order=1, Mounting Type="Surface Mount", Number of Turns=1, Packaging=TapeAndReel, Part Number=TC33X-2-103E, Part Status=Active, PartId=8, Price=0.15, Resistance="10 kOhms", Series="Trimpot® TC33 - Open Frame", Size / Dimension="Rectangular - 0.150\" x 0.142\" Face x 0.047\" H (3.80mm x 3.60mm x 1.20mm)", Supplier 1=DigiKey, Termination Style="J Lead"
R17 R33 R34 R35 R36: library part CRGP0603F5K6, "CRGP 0603 5K6 1%", Device Package="0603 (1608 Metric)", Manufacturer="TE Connectivity Passive Product", Operating Temperature="-55°C ~ 155°C", Power (Watts)="0.25W, 1/4W", Resistance=50KOHM, Supplier Device Package=0603, Supplier Part Number 1=A130425CT-ND, Temperature Coefficient=±100ppm/°C, Tolerance=±1%, ComponentLink1Description=Datasheet, ComponentLink1URL=https://www.te.com/commerce/DocumentDelivery/DDEController?Action=srchrtrv&DocNm=9-1773463-9&DocType=DS&DocLang=English, ComponentLink2Description="DigiKey Link", ComponentLink2URL=http://digikey.com/product-detail/en/te-connectivity-passive-product/CRGP0603F5K6/A130425CT-ND/8578257, Composition="Thick Film", Features="Pulse Withstanding", Height - Seated (Max)="0.022\" (0.55mm)", LastUpdated="9/2/2020 1:09:50 AM", Lifecycle Status=Active, Minimum Order=1, Number of Terminations=2, Package / Case="0603 (1608 Metric)", Packaging=TapeAndReel, Part Number=CRGP0603F5K6, Part Status=Active, PartId=20907, Price=0.02, Series=CRGP, Size / Dimension="0.063\" L x 0.031\" W (1.60mm x 0.80mm)", Supplier 1=DigiKey
R26 R27 R28 R29 R30 R31 R32: library part CMP-2000-06934-1, "Thick Film Resistor, 2.2 KOhm, 100 mW, 50 V, +/- 1%, -55 to 155 degC, 2-Pin SMD (0603), RoHS, Tape and Reel", Case Code - in=0603, Case Code - mm=1608, Manufacturer=Yageo, Operating Temperature Range=-55Cto+155C, Package Description="2-Pin Surface Mount Device, Body 1.6 x 0.8 mm", Power Rating=100mW, Resistance=2.2kOhms, Temperature Coefficient=100PPM/C, Tolerance=1%, Voltage Rating=50V, Datasheet URL=http://www.yageo.com/documents/recent/PYu-RC_Group_51_RoHS_L_7.pdf, Datasheet Version="Rev. 7, 05/2017", Manufacturer URL=http://www.yageo.com/, Mounting Technology=SurfaceMount, Package Reference=0603, Packaging=Reel, Product=ThickFilmResistorsGeneralPurpose, Series=RC, Termination Style=SMD/SMT
U1 U2: library part CMP-04896-000042-1, "IC QUAD DIFF COMPARATOR 14-SOIC", Case/Package=SOIC, Dual Supply Voltage=9V, Input Bias Current=100nA, Input Offset Voltage (Vos)=5mV, Max Dual Supply Voltage=18V, Max Operating Temperature=125°C, Max Power Dissipation=1.19W, Max Supply Current=500uA, Max Supply Voltage=36V, Min Dual Supply Voltage=1V, Min Operating Temperature=-55°C, Min Supply Voltage=2V, Nominal Supply Current=2mA, Operating Supply Voltage=28V, Output Current=20mA, Output Current per Channel=6mA, Package Quantity=1, Voltage Gain=106.02dB, Contact Plating=Gold, Height=1.58mm, Lead Free="Lead Free", Length=8.65mm, Max Input Current=100nA, Mount="Surface Mount", Number Of Channels=4, Number of Elements=4, Number of Pins=14, Output Type=TTL, Packaging="Tape and Reel", Quiescent Current=2mA, Radiation Hardening=No, REACH SVHC="No SVHC", Response Time=0.3us, RoHS Compliant=Yes, Series=LM139, Supply Current=2mA, Technology=BIPOLAR, Weight=0.004515oz, Width=3.91mm
U3: library part CMP-2000-06550-1, "Low-Power, Dual-Voltage Comparator, 2 to 36 V, 0 to 70 degC, 8-Pin SOIC (SO), RoHS, Tape and Reel", Current - Input Bias (Max)=0.25µA@5V, Current - Output (Typ)=18mA@5V, Current - Quiescent (Max)=2.5mA, Manufacturer=STMicroelectronics, Operating Temperature=0°C~70°C, Package / Case="8-SOIC(0.154\",3.90mmWidth)", Package Description="8-Pin Small Outline Integrated Circuit, Body 4.9 x 3.9 mm, Pitch 1.27 mm", Package Reference=SO-8, Standard Package=2,500, Supplier Device Package=8-SO, Voltage - Input Offset (Max)=5mV@30V, Voltage - Supply, Single/Dual (±)=2V~36V,±1V~18V, Category=IntegratedCircuits(ICs), Datasheet URL=http://www.st.com/content/ccc/resource/technical/document/datasheet/group1/b4/cc/cf/13/18/28/44/f5/CD00000465/files/CD00000465.pdf/jcr:content/translations/en.CD00000465.pdf, Datasheet Version="Rev. 15, 02/2016", EDA / CAD Models=DownloadfromAcceleratedDesigns, Family=Linear-Comparators, Manufacturer URL=http://www.st.com/, Mounting Technology=SurfaceMount, Mounting Type=SurfaceMount, Number of Elements=2, Online Catalog=Comparators-2elements, Other Names=497-1593-2, Other Related Documents=LM393ViewAllSpecificationsLM393ViewAllSpecifications, Output Type=CMOS,DTL,ECL,MOS,Open-Collector,TTL, Packaging=Tape&Reel(TR), Type=GeneralPurpose
U4: library part CMP-0806-00069-3, "CMOS Dual 4-Input NOR Gate, D0014A, LARGE T&R", F @ Nom Voltage(Max)(Mhz)=8, Generic Part Number=CD4002B, ICC @ Nom Voltage(Max)(mA)=0.015, Manufacturer="Texas Instruments", Operating Temperature Range(C)="-55 to 125", Rating=Catalog, tpd @ Nom Voltage(Max)(ns)=120, Voltage(Nom)(V)=10, Bits(#)=2, Code_JEDEC=MS-012, DatasheetVersion=SCHS015C, Input Type=CMOS, Output Drive (IOL/IOH)(Max)(mA)=1.5/-1.5, Output Type=CMOS, PackageReference=D0014A, PackageVersion=http://www.ti.com/lit/ml/mpds177g/mpds177g.pdf, VCC(Max)(V)=18, VCC(Min)(V)=3
U5: library part CMP-1627-00065-2, "CMOS Quad 2-Input NAND Gate, D0014A, LARGE T&R", F @ Nom Voltage(Max)(Mhz)=8, Generic Part Number=CD4011B, ICC @ Nom Voltage(Max)(mA)=0.015, Manufacturer="Texas Instruments", Operating Temperature Range(C)="-55 to 125", Rating=Military, Voltage(Nom)(V)=10, Bits(#)=4, Code_JEDEC=MS-012, DatasheetVersion=SCHS021D, Input Type=CMOS, Output Drive (IOL/IOH)(Max)(mA)=1.5/-1.5, Output Type=CMOS, PackageReference=D0014A, Schmitt Trigger=No, Technology Family=CD4000, VCC(Max)(V)=18, VCC(Min)(V)=3
U6: library part CMP-1627-00002-2, "CMOS Dual 2-Input NAND Buffer/Driver, D0008A, LARGE T&R", F @ Nom Voltage(Max)(Mhz)=8, Generic Part Number=CD40107B, ICC @ Nom Voltage(Max)(mA)=0.06, Manufacturer="Texas Instruments", Operating Temperature Range(C)="-55 to 125", Rating=Catalog, Voltage(Nom)(V)=10, Bits(#)=2, DatasheetVersion=SCHS098D, Input Type=CMOS, Output Drive (IOL/IOH)(Max)(mA)=0/-85, Output Type=CMOS, PackageReference=D0008A, Schmitt Trigger=No, Technology Family=CD4000, VCC(Max)(V)=18, VCC(Min)(V)=3
U7: "Linear Voltage Regulator IC Positive Fixed 1 Output 500mA DPAK"

## Free pads (board coordinates)
  round 7 hole 3.8 unplated: 2(5,43) 2(5,86) 2(85,43) 2(85,86)
  rect 2x2 hole 1.25: 3(25.925,40.875) 3(30.975,40.875)
  rect 2x2 hole 0.9: 3(29.3,88.85) 3(34.308,88.782)
  round 1.5 hole 1: 4(4.8,59.8)

## Via types
v1: diameter 1.27, hole 0.711, Top Copper to Bottom Copper, 94 vias
v2: diameter 0.7, hole 0.35, Top Copper to Bottom Copper, 41 vias
v3: diameter 0.6, hole 0.25, Top Copper to Bottom Copper, 38 vias
v4: diameter 0.7, hole 0.35, Top Copper to Bottom Copper, tented top, 1 vias

## Nets (pads, with @x,y where several pads share a name; then routed paths per layer and width w, separated by ;. In a path a pad name is that pad's centre, name@x,y a point inside that pad or via, vN(x,y) a via of type N, cw(c..) or ccw(c..) an arc to the next point about the centre after c; other vN are vias at no path point)
+0.5V: R1.1 R3.2 U1.7 U1.9 U2.7 U2.11 | length 51.9
  Top Copper w0.254: U2.11 73.534,52.241 73.667,52.108 73.957,52.108 U2.7@77.344,48.721 ; U1.9 78.769,78.486 80.039,79.756 U1.7 83.244,79.756 87,76 87,69.75 83.4,66.15 R1.1 ; U2.7@77.344,48.799 77.344,48.556 U2.7 78.533,48.133 83.234,52.834 R3.2@83.234,59.035 ; R3.2@83.266,59.035 R1.1@83.266,60.641
+4.5V: R2.2 R4.2 U1.4 U1.10 U2.4 U2.8 | length 49.3
  Top Copper w0.254: U2.4 73.534,51.249 72.933,51.85 72.933,54.227 74.998,56.292 75.902,56.292 77.344,54.851 ; U1.10 78.769,77.216 80.039,75.946 81.36,75.946 81.664,76.25 85,76.25 86,75.25 86,69.5 79.1,62.6 R2.2 R4.2 79.1,56.607 77.344,54.851 ; U2.8 77.344,54.851
+5V: C1.1 C2.1 C3.1 C4.1 C5.1 C7.1 C9.1 C10.2 IC1.16 R1.2 R2.1 R5.1 R6.1 R7.1 R8.1 R9.1 R10.1 R11.1 R12.1 R13.2 R14.2 R15.2 R18.1 R19.1 R20.1 R21.1 U1.3 U2.3 U3.8 U4.14 U5.14 U6.8 U7.3 | length 92.9
  Top Copper w0.2: R21.1 R21.1@46.875,74.337 ; R19.1 55.125,70.888 R19.1@55.147,70.866
  Top Copper w0.254: R21.1@46.875,74.337 v2(46.875,75.85) ; C7.1 U3.8@53.213,65.425 ; U3.8 U3.8@53.213,65.425 ; R13.2 55.098,88.773 55.449,88.422 R14.2 55.549,88.422 56.75,87.221 56.75,85.2 v2(56.675,85.125) ; v2(54.475,81.4) 53.721,80.646 U6.8 54.547,79.503 54.85,79.2 54.85,78.825 55.225,78.45 C2.1@55.95,78.45 ; v2(54.734,63.2) 54.83,63.296 54.83,63.765 55.091,64.027 55.091,65.236 R18.1 53.375,65.263 U3.8@53.213,65.425 ; R19.1@55.125,70.888 R20.1 ; R19.1@55.147,70.866 v2(56.85,70.866) ; C2.1 56.95,77.7 56.95,76.8 v2(56.925,76.775) ; v2(56.475,57.525) 56.871,57.921 C4.1 U5.14 ; IC1.16 C9.1 60.007,78.232 v2(60.65,78.875) ; v2(61.475,68.525) 61.61,68.525 61.943,68.858 R15.2 ; v2@66.975,43.675 v2(66.975,43.673) R8.1 70.598,43.673 R5.1 70.938,43.983 71.299,43.983 C1.1 U2.3 72.264,49.861 v2(71.975,50.15) ; R6.1 67.996,54.229 68.979,55.212 68.979,55.454 v2(69.075,55.55) ; v2(68.003,65.578) 68.582,66.157 68.983,66.157 C3.1@69.231,66.405 ; U4.14 C3.1@69.231,66.405 ; v2(72.775,68.5) 72.775,69.25 73.4,69.875 R10.1 ; R7.1 76.875,57.425 v2(77.425,56.875) ; R2.1 81.25,60.75 ; v2(80.575,62.2) 81.25,61.525 81.25,60.75 ; R1.2 81.25,60.75 ; C5.1 83.675,74.65 83.675,74.124 84.724,73.075 R9.1 R12.1 v2(84.725,69.825) ; C5.1@83.439,74.676 U1.3 v2(78.3,74.675) 77.727,74.103 73.022,74.103 72.375,73.456 72.375,73.356 70.891,71.873 70.891,70.325 70.891,67.742 70.01,66.86 69.686,66.86 C3.1@69.231,66.405
  Top Copper w1: 40.05,48.2 40.054,48.204 C10.2 44.421,48.302 49.22,48.302 U7.3
  other v2: 70.875,70.325
  other v3: 38,45 39,45 40,45 41,45 38.5,46 39.5,46 40.5,46 38,47 39,47 40,47 41,47 42,47 46,47 47,47 48,47 38.5,48 39.5,48 40.5,48 41.5,48 46.5,48 47.5,48 50.5,48 38,49 39,49 40,49 41,49 46,49 47,49 48,49 51,49 38.5,50 39.5,50 42.5,50 44.5,50 45.5,50 46.5,50 47.5,50 50.5,50
APPS1: J6.1 J13.1 J16.3 R34.1 U2.5 U2.6 | length 67.3
  Top Copper w0.254: J6.1 J16.3 41.885,78.986 42.1,78.771 v2(42.1,78.65) ; U2.5 74.804,47.467 75.439,46.832 ; U2.6 76.074,47.467 75.439,46.832 ; R34.1 76.475,45.9 J13.1 75.439,44.936 75.439,46.832
  Signal Layer 1 w0.254: v2(42.1,78.65) 42.125,78.65 43.35,77.425 44.446,77.425 48.256,73.614 48.853,73.614 52.664,69.804 53.071,69.804 63.791,59.084 63.791,56.584 J13.1
APPS2: J8.1 J15.1 J16.1 R33.1 U2.9 U2.10 | length 54.9
  Top Copper w0.2: U2.9 76.1,52.739 76.1,51 76.85,50.25 R33.1
  Top Copper w0.254: J16.1 J8.1 ; U2.10 74.804,53.431 75.475,54.102 ; J15.1@75.475,55.2 75.475,54.102 ; U2.9 76.074,53.503 75.475,54.102
  Bottom Copper w0.2: J16.1@46.956,85.809 J16.1 68.726,64.039 68.726,61.924 J15.1
BRAKE: J4.1 J11.1 J16.5 R35.1 U1.8 U1.11 U3.5 | length 77.2
  Top Copper w0.254: J4.1 J16.5 40.425,82.18 40.425,70.875 42.575,68.725 42.575,66.249 43.649,65.175 47.8,65.175 v2(48.64,64.335) 49.403,65.097 U3.5 ; v2(62.075,67.4) 65.663,67.4 70.253,71.99 70.253,77.492 J11.1 74.204,79.756 74.806,79.155 ; R35.1 73.65,75.9 76.027,75.9 U1.11 ; U1.11@75.74,75.946 75.407,75.946 74.806,76.547 74.806,79.155 ; U1.8 75.407,79.756 74.806,79.155
  Bottom Copper w0.254: v2(48.64,64.335) 50.309,66.003 60.203,66.003 61.231,67.031 61.585,67.031 61.954,67.4 v2(62.075,67.4)
BRAKECHECK: J7.1 J14.1 J16.2 Q2.1 R18.2 U3.7 U5.9 | length 77.6
  Top Copper w0.254: Q2.1 12.45,74.35 v2(13.25,74.35) ; J7.1 J16.2 44.425,76.725 43.7,76 43.7,70.279 45.415,68.564 49.751,68.564 51.943,66.372 U3.7@51.943,65.797 ; J14.1 51.943,64.516 U3.7 U3.7@51.943,65.797 ; U5.9 58.986,65.405 57.828,66.563 R18.2 52.709,66.563 U3.7@51.943,65.797
  Bottom Copper w0.254: v2(13.25,74.35) 34.75,74.35 42.8,82.4 v2(44.4,82.4)
BRAKEREF: R23.2 U3.6 | length 5.9
  Top Copper w0.254: R23.2 48.959,67.511 50.673,65.797 U3.6
BSP_CHECK: Q3.1 R17.2 U5.10 | length 50.9
  Top Copper w0.254: Q3.1 17.263,72.95 17.462,72.75 18.35,72.75 v2(19.075,72.025) ; v2(38.475,71.675) 38.475,68.4 43.488,63.387 47.307,63.387 50.115,60.579 R17.2 50.49,60.904 50.636,60.904 50.657,60.925 51.75,60.925 52.225,61.4 54.575,61.4 57.31,64.135 U5.10
  Signal Layer 1 w0.254: v2(19.075,72.025) 37.99,72.025 38.34,71.675 v2(38.475,71.675)
BSP_CHECK_DELAY: C11.1 R16.2 U5.12 | length 12.2
  Top Copper w0.254: R16.2 52.758,59.007 C11.1 52.75,59.065 52.75,59.875 53.375,60.5 57.891,60.5 58.986,61.595 U5.12
GND: C1.2 C2.2 C3.2 C4.2 C5.2 C6.1 C7.2 C8.1 C9.2 C10.1 C11.2 IC1.6 IC1.7 IC1.8 IC1.11 IC1.12 IC1.14 IC1.15 J16.6 pad.2 pad.3@34.308,88.782 Q1.2 Q2.2 Q2.5 Q3.2 Q3.5 Q4.2 Q4.5 R3.1 R4.1 R13.1 R24.1 R25.1 R33.2 R34.2 R35.2 R36.2 U1.12 U2.12 U3.4 U4.7 U5.7 U6.2 U6.4 U7.4 | length 3.7
  Top Copper w0.254: R13.1 52.421,87.172 C6.1 ; R4.1 R3.1 ; C5.2 C5.2@84.749,75.224
  other v1: 9,41 12,41 15,41 18,41 21,41 34,41 37,41 40,41 43,41 46,41 57,41 60,41 63,41 66,41 69,41 72,41 75,41 78,41 81,41 78.74,43.18 63.5,44.45 34.1,45.3 1.93,46.99 21.8,47.7 82.55,48.26 2,49 28.6,49.1 63.5,49.53 88,50 2,52 38.1,52.07 88,53 79.2,53.3 57.15,54.61 63.5,54.61 2,55 88,56 81.1,56.7 2,58 44.45,58.42 88,59 12.2,59.1 18.1,59.1 7.62,60.96 26.67,60.96 2,61 71.7,61.6 75.1,61.6 88,62 40.64,62.23 2,64 88,65 22.2,65.3 10.4,65.4 16.3,65.5 5.4,66.5 2,67 88,68 82.3,68.8 28.7,69.7 2,70 88,71 2,73 88,74 71.3,75.7 2,76 25.7,76.3 22.8,76.4 88,77 10.5,77.4 71.7,77.4 35.56,77.47 2,79 68.4,79.6 63.2,79.7 88,80 25.7,80.2 2,82 75.6,83.9 78.7,85.8 71.7,87 10,89 13,89 16,89 19,89 22,89 59,89 62,89 65,89 68,89 71,89 74,89 77,89 80,89
  other v2: 55.88,81.28
HALL: J3.1 J10.1 J16.7 R36.1 U1.5 U1.6 U3.3 | length 111.7
  Top Copper w0.2: U3.3 U3.3@50.687,70.684 ; v2@50.687,69.213 v2(50.7,69.2) ; R36.1 84.55,79.55 v4(85.4,78.7)
  Top Copper w0.254: J3.1 J16.7 33.75,83.775 37.125,83.775 39.5,81.4 39.5,70.575 41.5,68.575 41.5,66 43.125,64.375 v2(45.05,64.375) ; v2@50.687,69.213 U3.3@50.687,70.684 ; U1.5 81.373,77.216 82.007,77.85 ; U1.6 81.371,78.486 82.007,77.85 ; J10.1 82.007,77.85
  Bottom Copper w0.2: v2(45.05,64.375) 49.875,69.2 v2(50.7,69.2) 50.816,69.2 51.693,68.323 55.784,68.323 57.103,69.642 61.174,69.642 67.671,63.145 67.671,61.477 75.01,54.138 75.89,54.138 79.543,57.791 79.543,73.943 J10.1 83.45,78.05 83.7,78.3 83.718,78.282 83.882,78.282 84.3,78.7 v4(85.4,78.7)
HALLCHECK: J2.1 J9.1 J16.4 Q2.3 R19.2 U3.1 U5.8 | length 78.7
  Top Copper w0.254: v2(8.85,75.025) 9.425,74.45 Q2.3 ; J16.4 J2.1 ; v2(52.052,69.152) 52.1,69.2 52.979,69.2 53.213,69.434 ; U3.1 53.213,69.434 ; J9.1 59.309,66.702 U5.8 58.986,66.675 56.08,69.581 R19.2 53.36,69.581 53.213,69.434
  Bottom Copper w0.254: v2(8.85,75.025) 27.567,75.025 38.204,85.662 39.207,85.662 J16.4 41.795,83.35 46.65,83.35 53.7,76.3 53.7,69.8 53.1,69.2 52.1,69.2 v2(52.052,69.152)
HALLREF: R22.2 U3.2 | length 4.4
  Top Copper w0.254: R22.2 49.657,74.118 51.943,71.832 U3.2
INV_PC: Q3.3 U5.4 U5.13 | length 62.1
  Top Copper w0.254: v2(13.85,71.05) 13.85,72.725 14.45,73.325 15.263,73.325 Q3.3 ; U5.13 v2(61.696,60.325) 64.236,62.865 U5.4
  Signal Layer 1 w0.2: v2(13.85,71.05) 31.7,71.05 34.425,68.325 53.696,68.325 v2(61.696,60.325)
LATCH_OUT: IC1.2 U6.6 U6.7 | length 13.9
  Top Copper w0.254: U6.6 U6.7 52.512,79.442 52.512,78.546 53.707,77.35 55.15,77.35 60.198,72.302 IC1.2
LATCH_RESET: IC1.3 J1.1 Q4.1 U6.3 | length 70
  Top Copper w0.254: Q4.1 23.375,73.05 v2(26.55,73.05) 24.7,74.9 24.7,82.3 24.105,82.895 24.105,85.8 24.102,85.803 24.102,88.998 J1.1 ; v2(45.183,81.337) 49.462,81.337 51.181,83.056 ; U6.3 51.181,83.056 ; IC1.3 61.468,72.094 57.875,75.687 57.875,80.7 56.125,82.45 51.775,82.45 51.181,83.044 51.181,83.056
  Signal Layer 1 w0.254: v2(26.55,73.05) 34.837,81.337 v2(45.183,81.337)
LATCH_SET: IC1.4 Q4.3 U5.11 | length 53
  Top Copper w0.254: Q4.3 21.3,72.95 22.525,71.725 25.958,71.725 27.4,70.283 27.4,69.025 28.65,67.775 v2(33.525,67.775) ; v2(57.15,62.875) 57.155,62.87 59.506,62.87 59.511,62.865 59.686,62.865 60.825,64.004 60.825,68.75 62.36,70.285 62.513,70.285 62.738,70.51 IC1.4
  Signal Layer 1 w0.2: v2(33.525,67.775) 33.55,67.8 52.225,67.8 v2(57.15,62.875)
NetC6_2: C6.2 R14.1 U6.1 | length 3.9
  Top Copper w0.254: U6.1 C6.2 R14.1
NetIC1_5: IC1.5 R15.1 | length 2.4
  Top Copper w0.254: IC1.5 64.008,70.51 64.5,70.018 64.5,69.35 ; R15.1 64.499,69.183 64.499,69.349 ; 64.499,69.349 64.5,69.35
NetLabel51: U5.3 U5.5 U5.6 | length 4.8
  Top Copper w0.254: U5.3 64.936,61.595 65.514,62.173 65.514,63.238 64.586,64.166 U5.6
NetLED1_1: LED1.1 Q2.4 | length 2.1
  Top Copper w0.4: LED1.1 8.975,68.825 9.325,69.175 9.325,69.625 9.4,69.7 9.4,70.7 Q2.4
NetLED1_2: LED1.2 R28.1 | length 1.5
  Top Copper w0.5: R28.1 8.913,65.263 8.913,66.713 LED1.2
NetLED2_1: LED2.1 Q3.4 | length 2.2
  Top Copper w0.4: LED2.1 14.885,68.825 15.235,69.175 15.235,69.735 15.4,69.9 15.4,70.688 Q3.4
NetLED2_2: LED2.2 R30.1 | length 1.5
  Top Copper w0.5: R30.1 14.817,65.267 14.817,66.708 LED2.2
NetLED3_1: LED3.1 Q4.6 | length 2.1
  Top Copper w0.4: Q4.6 23.2,69.7 23.3,69.6 23.3,69.175 23.65,68.825 LED3.1
NetLED3_2: LED3.2 R31.1 | length 1.5
  Top Copper w0.5: R31.1 LED3.2
NetLED4_1: LED4.1 Q2.6 | length 2.2
  Top Copper w0.4: Q2.6 11.3,70.7 11.3,69.7 11.48,69.52 11.48,69.175 11.83,68.825 LED4.1
NetLED4_2: LED4.2 R27.1 | length 1.5
  Top Copper w0.381: LED4.2 11.9,66.705 R27.1
NetLED5_1: LED5.1 Q3.6 | length 2.1
  Top Copper w0.4: Q3.6 17.3,70.688 17.3,69.8 17.39,69.71 17.39,69.175 17.74,68.825 LED5.1
NetLED5_2: LED5.2 R29.1 | length 1.5
  Top Copper w0.5: LED5.2 17.795,66.72 17.795,65.255 R29.1
NetLED6_1: LED6.1 Q4.4 | length 2.2
  Top Copper w0.4: LED6.1 20.795,68.825 21.145,69.175 21.145,69.545 21.3,69.7 Q4.4
NetLED6_2: LED6.2 R32.1 | length 1.5
  Top Copper w0.5: R32.1 20.722,65.272 20.722,66.703 LED6.2
NetLED7_2: LED7.2 R26.2 | length 1.7
  Top Copper w0.381: R26.2 LED7.2
NetR5_2: R5.2 U2.2 U4.3 | length 19.4
  Top Copper w0.254: R5.2 70.613,47.04 70.994,47.421 U2.2 70.994,48.799 69.172,50.621 68.925,50.621 67.168,52.378 67.168,54.78 68.663,56.275 71.175,56.275 71.771,56.871 U4.3
NetR6_2: R6.2 U2.14 U4.4 | length 10.3
  Top Copper w0.254: R6.2 68.11,52.765 U2.14 69.724,55.098 69.873,55.247 71.197,55.247 73.041,57.091 U4.4
NetR7_2: R7.2 U2.13 U4.5 | length 7.7
  Top Copper w0.254: U2.13 70.994,54.194 74.311,57.511 U4.5
NetR8_2: R8.2 U2.1 U4.2 | length 17.2
  Top Copper w0.254: R8.2 69.012,44.973 69.724,45.685 U2.1 ; U2.1 69.723,49.253 66.765,52.211 66.765,54.995 70.501,58.731 U4.2
NetR9_2: R9.2 U1.2 U4.10 | length 15
  Top Copper w0.254: U4.10 74.311,64.681 77.222,67.592 77.222,70.588 80.039,73.406 U1.2 83.093,73.406 83.424,73.075 R9.2
NetR10_2: R10.2 U1.14 U4.11 | length 9.1
  Top Copper w0.254: U4.11 73.041,67.393 76.073,70.425 U1.14
NetR11_2: R11.2 U1.13 U4.12 | length 13
  Top Copper w0.254: U4.12 71.771,69.77 U1.13@75.407,73.406 ; R11.2 U1.13@75.407,73.406 ; U1.13 U1.13@75.407,73.406
NetR12_2: R12.2 U1.1 U4.9 | length 13
  Top Copper w0.254: U4.9 75.581,64.681 75.729,64.829 75.754,64.829 80.705,69.78 U1.1 82.712,72.136 83.424,71.424 R12.2
NetR16_3: R16.3 R17.1 | length 6
  Top Copper w0.254: R16.3 50.65,55.118 50.65,57.075 50.165,57.56 R17.1
NetR20_2: R20.2 R22.1 | length 2.5
  Top Copper w0.254: R22.1 53.888,73.168 54.272,73.552 54.827,73.552 R20.2
NetR21_2: R21.2 R23.1 | length 2.3
  Top Copper w0.2: R23.1 R23.1@46.863,70.777
  Top Copper w0.254: R23.1@46.863,70.777 R21.2
NetR22_3: R22.3 R24.2 | length 2.6
  Top Copper w0.254: R24.2 51.775,77.175 52.465,76.485 52.515,76.485 52.907,76.093 R22.3
NetR23_3: R23.3 R25.2 | length 2.3
  Top Copper w0.2: R25.2 R25.2@44.847,72.994
  Top Copper w0.254: R23.3 R25.2@44.847,72.994
NMOS_DRAIN: D1.2 K1.4 LED7.1 pad.4 Q1.3 | length 58.1
  Top Copper w0.381: pad.4 7.375,59.8 K1.4@9.875,57.3 ; D1.2 5.2,57.077 5.423,57.3 K1.4@9.875,57.3 ; LED7.1 22.202,44.252 22.202,45.001 21.803,45.4 18.2,45.4 10.025,53.575 K1.4 K1.4@9.875,57.3 ; v2@28.388,67.062 Q1.3@30.513,67.062
  Bottom Copper w0.381: K1.4 18.45,57.15 v2(28.375,67.075)
PLAUS1: U4.1 U5.1 | length 4.7
  Top Copper w0.254: U5.1 69.205,59.055 U4.1
PLAUS2: U4.13 U5.2 | length 7.8
  Top Copper w0.254: U5.2 66.845,60.325 70.501,63.981 U4.13
SDC+: K1.3 pad.3@25.925,40.875 | length 35.9
  Signal Layer 1 w2.54: pad.3@25.925,40.875 25.925,53.05 K1.3
  Bottom Copper w2.54: pad.3@25.925,40.875 25.925,53.05 K1.3
SDC-: K1.1 pad.3@30.975,40.875 | length 19.5
  Signal Layer 1 w2.54: pad.3@30.975,40.875 31,40.9 31,47.025 K1.1
  Bottom Copper w2.54: pad.3@30.975,40.875 30.975,47 K1.1
SDC_OUT: J5.1 J12.1 J16.9 Q1.1 U6.5 | length 44.8
  Top Copper w0.254: J5.1 26.652,88.948 26.652,85.807 J16.9 26.645,76.855 v2@29.675,73.825 ; v2(29.675,73.746) 31,72.421 Q1.1 ; J12.1 U6.5 U6.5
  Bottom Copper w0.254: v2(29.675,73.746) 36.231,73.746 41.987,79.502 J12.1
VCC: C8.2 D1.1 J16.8 K1.2 pad.3@29.3,88.85 R26.1 R27.2 R28.2 R29.2 R30.2 R31.2 R32.2 U7.1 | length 137.3
  Top Copper w0.381: D1.1 5.2,49.9 5.55,49.55 K1.2 10.025,44.975 10.8,44.2 R26.1
  Top Copper w0.5: R28.2 11.6,63.95 R30.2 R29.2 R32.2 R31.2 25.95,63.95 26,63.9
  Top Copper w1: 26,63.9 27,63.9 ; 47.5,52.025 47.662,51.862 52.713,51.862 53.78,50.795 U7.1 ; U7.1@53.78,47.851 C8.2
  Top Copper w1.5: 27,63.9 28.5,63.9
  Top Copper w2: 28.5,63.9 31.425,63.9 35.575,59.75 ; pad.3@29.3,88.85 29.242,88.792 29.242,85.858 J16.8 29.185,77.74 35.575,71.35 v2(35.575,65.25) 35.575,59.75 ; 47.5,52.025 43.3,52.025 35.575,59.75
  Bottom Copper w0.381: K1.2 17.529,49.55 28.354,60.375 v2(35.425,60.375)
pads on no net: IC1.1 IC1.9 IC1.10 IC1.13 J16.10 R16.1 U4.6 U4.8

## Polygon pours and split planes (outlines as drawn)
GND on Top Copper "GND_L01_P005" (solid, pour order 5): 1,43 1,86 cw(c5,86) 5,90 85,90 cw(c85,86) 89,86 89,43 cw(c85,43) 85,39 5,39 cw(c5,43)
+5V on Top Copper "+5V_L01_P000" (solid, pour order 0): 37.379,46 ccw(c39.5,46) 41.621,46 41.621,46.311 49.432,46.311 49.5,46.379 ccw(c49.5,48.5) 49.5,50.621 39.5,50.621 ccw(c39.5,48.5) 37.379,48.5
GND on Signal Layer 1 "GND_L02_P007" (solid, pour order 7): 1,43 1,86 cw(c5,86) 5,90 85,90 cw(c85,86) 89,86 89,43 cw(c85,43) 85,39 5,39 cw(c5,43)
GND on Bottom Copper "GND_L04_P008" (solid, pour order 8): 1,43 1,86 cw(c5,86) 5,90 85,90 cw(c85,86) 89,86 89,43 cw(c85,43) 85,39 5,39 cw(c5,43)
+5V on Signal Layer 2 "+5V_L03_P006" (solid, pour order 6): 1,43 1,86 cw(c5,86) 5,90 85,90 cw(c85,86) 89,86 89,43 cw(c85,43) 85,39 5,39 cw(c5,43)

## Silkscreen, mask and mechanical layers (free items; w line width, h text height)
Top Overlay:
  drawing of 75 lines, arcs and shapes, not listed
  text "BSPD V1.0" at 57.9,85.5 h2
  text "MATHEWOS SAMSON" at 57.75,83.35 h1
  text "Please work" at 27.547,81.707 h1.52 r300
  text "KENNESAW MOTORSPORTS FSAE" at 57.75,81.35 h1
  text "Hall adj" at 41.05,75.683 h1
  text "Brake adj" at 39.75,65.383 h1
  text "HC" at 9.65,61.35 h1 r90
  text "BC" at 12.55,61.35 h1 r90
  text "PC" at 15.45,61.35 h1 r90
  text "LS" at 21.25,61.35 h1 r90
  text "LR" at 24.25,61.35 h1 r90
  text "BSP" at 18.45,60.35 h1 r90
  text "Delay adj" at 40.25,54.683 h1
  text "JLCJLCJLCJLC" at 17.15,52.15 h1
  text "SDC STATUS" at 14.35,45.05 h1
  text "SDC I/O" at 23.55,42.8 h1
  text "-" at 27.95,40.25 h1
  text "+" at 22.95,40.083 h1
Bottom Overlay:
  drawing of 39 lines, arcs and shapes, not listed
  text "1: APPS2" at 21.55,87 h1
  text "2: BRAKECHECK" at 21.55,85.408 h1
  text "3: APPS1" at 21.55,83.817 h1
  text "10" at 24.725,83.3 h1
  text "9" at 27.025,83.3 h1
  text "8" at 29.525,83.3 h1
  text "7" at 32.1,83.3 h1
  text "6" at 34.65,83.3 h1
  text "5" at 37.125,83.3 h1
  text "4" at 39.85,83.3 h1
  text "3" at 42.325,83.3 h1
  text "2" at 44.775,83.3 h1
  text "1" at 47.2,83.3 h1
  text "4: HALLCHECK" at 21.55,82.225 h1
  text "5: BRAKE" at 21.55,80.633 h1
  text "6: GND" at 21.55,79.042 h1
  text "7: HALL" at 21.55,77.45 h1
  text "8: VCC (MAX 16V)" at 21.55,75.858 h1
  text "9: SDC OUT" at 21.55,74.267 h1
  text "10: RESET" at 21.55,72.675 h1
Mechanical 1:
  lines w0.127: 0,43 ccw(c5,43) 5,38 85,38 ccw(c85,43) 90,43 90,86 ccw(c85,86) 85,91 5,91 ccw(c5,86) 0,86.005 0,43
  lines w0.254: 49.432,46.311 41.621,46.311 41.621,46 cw(c39.5,46) 37.379,46 37.379,48.5 cw(c39.5,48.5) 39.5,50.621 49.5,50.621 cw(c49.5,48.5) 49.5,46.379 ; 1,43 ccw(c5,43) 5,39 85,39 ccw(c85,43) 89,43 89,86 ccw(c85,86) 85,90 5,90 ccw(c5,86) 1,86 1,43

## Dimensions
5,38 to 5,91 on Mechanical 1
0,43 to 90,43 on Mechanical 1

## Text inside footprints (layer, text, board x,y; h text height)
J16: Top Overlay "1" at 47.155,84.1 h1.02 r180; Top Overlay "10" at 24.785,84.1 h1.02 r180